# Altium PCB 数控稳压电源.PcbDoc
Units mil, origin at the board's own origin, x right, y up, seen from the top; angles counter-clockwise.
Board outline 17575 x 11690 mil, 2 copper layers (Top Layer, Bottom Layer); 59 components, 55 nets, 273 pads, 0 vias.
Unrouted connection lines stored in the file: 196.
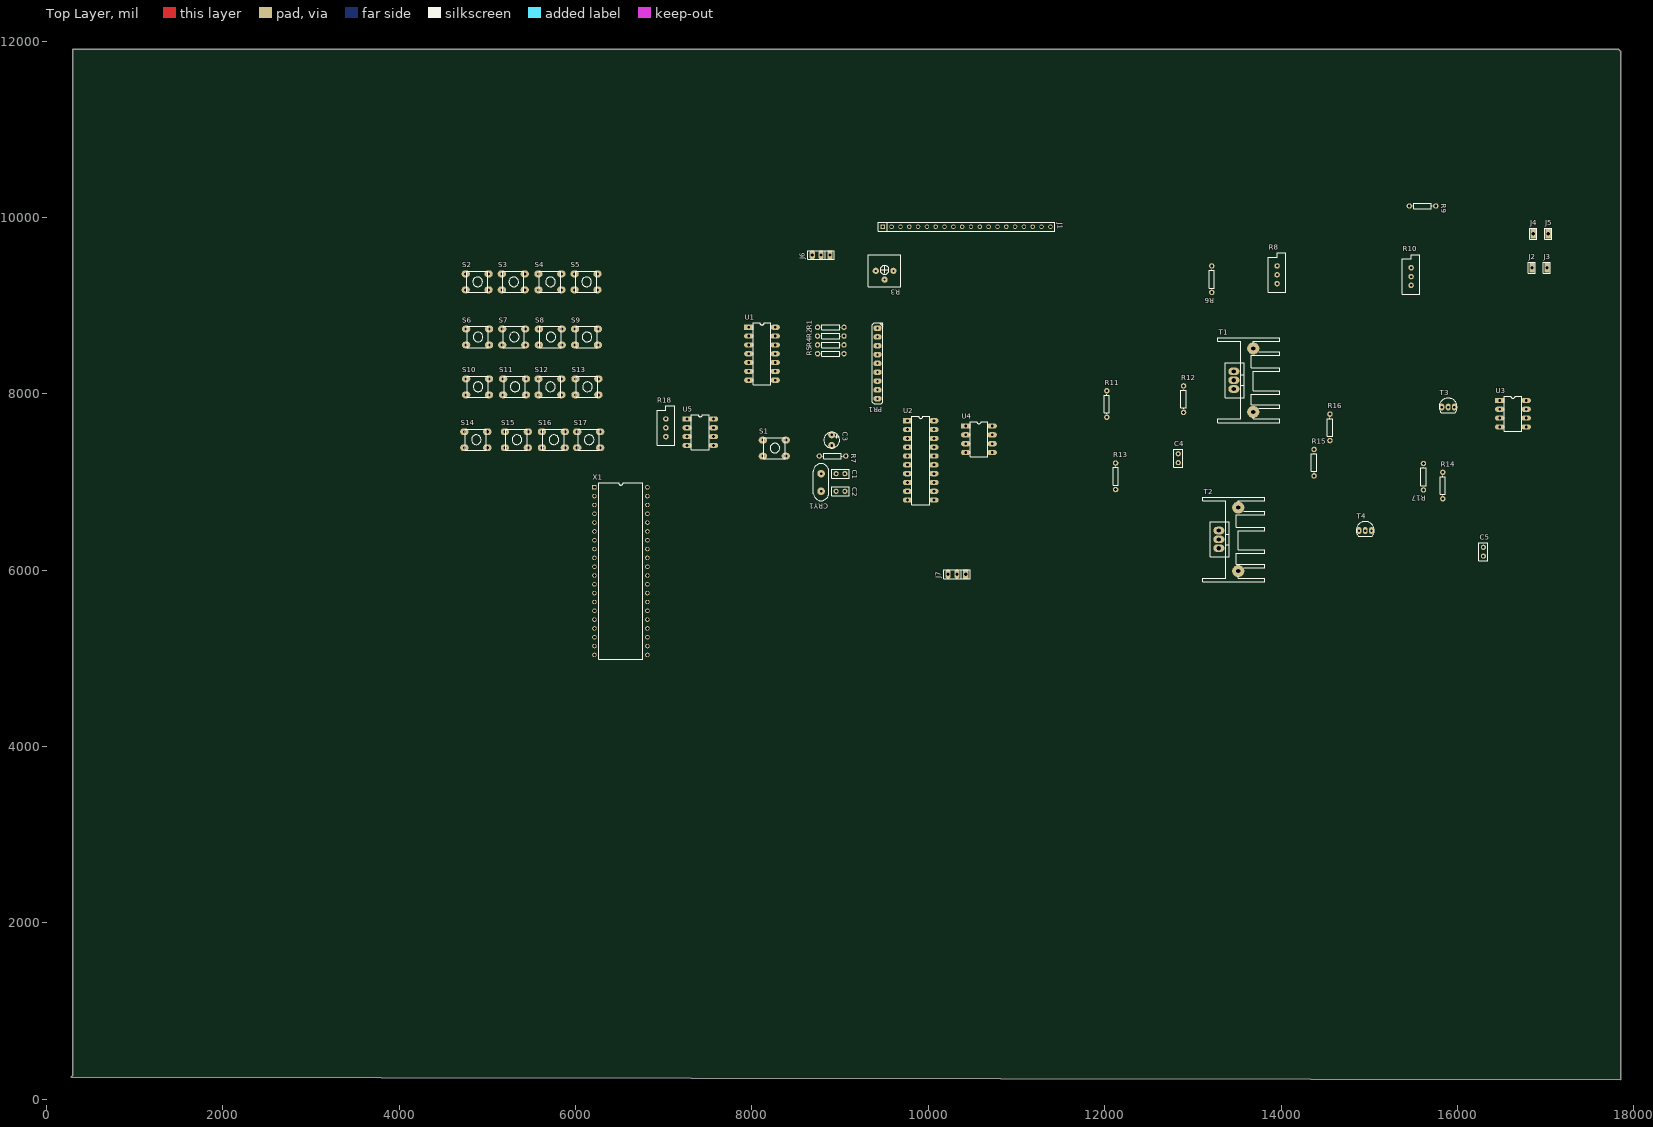
[diagram p0: Top Layer view]
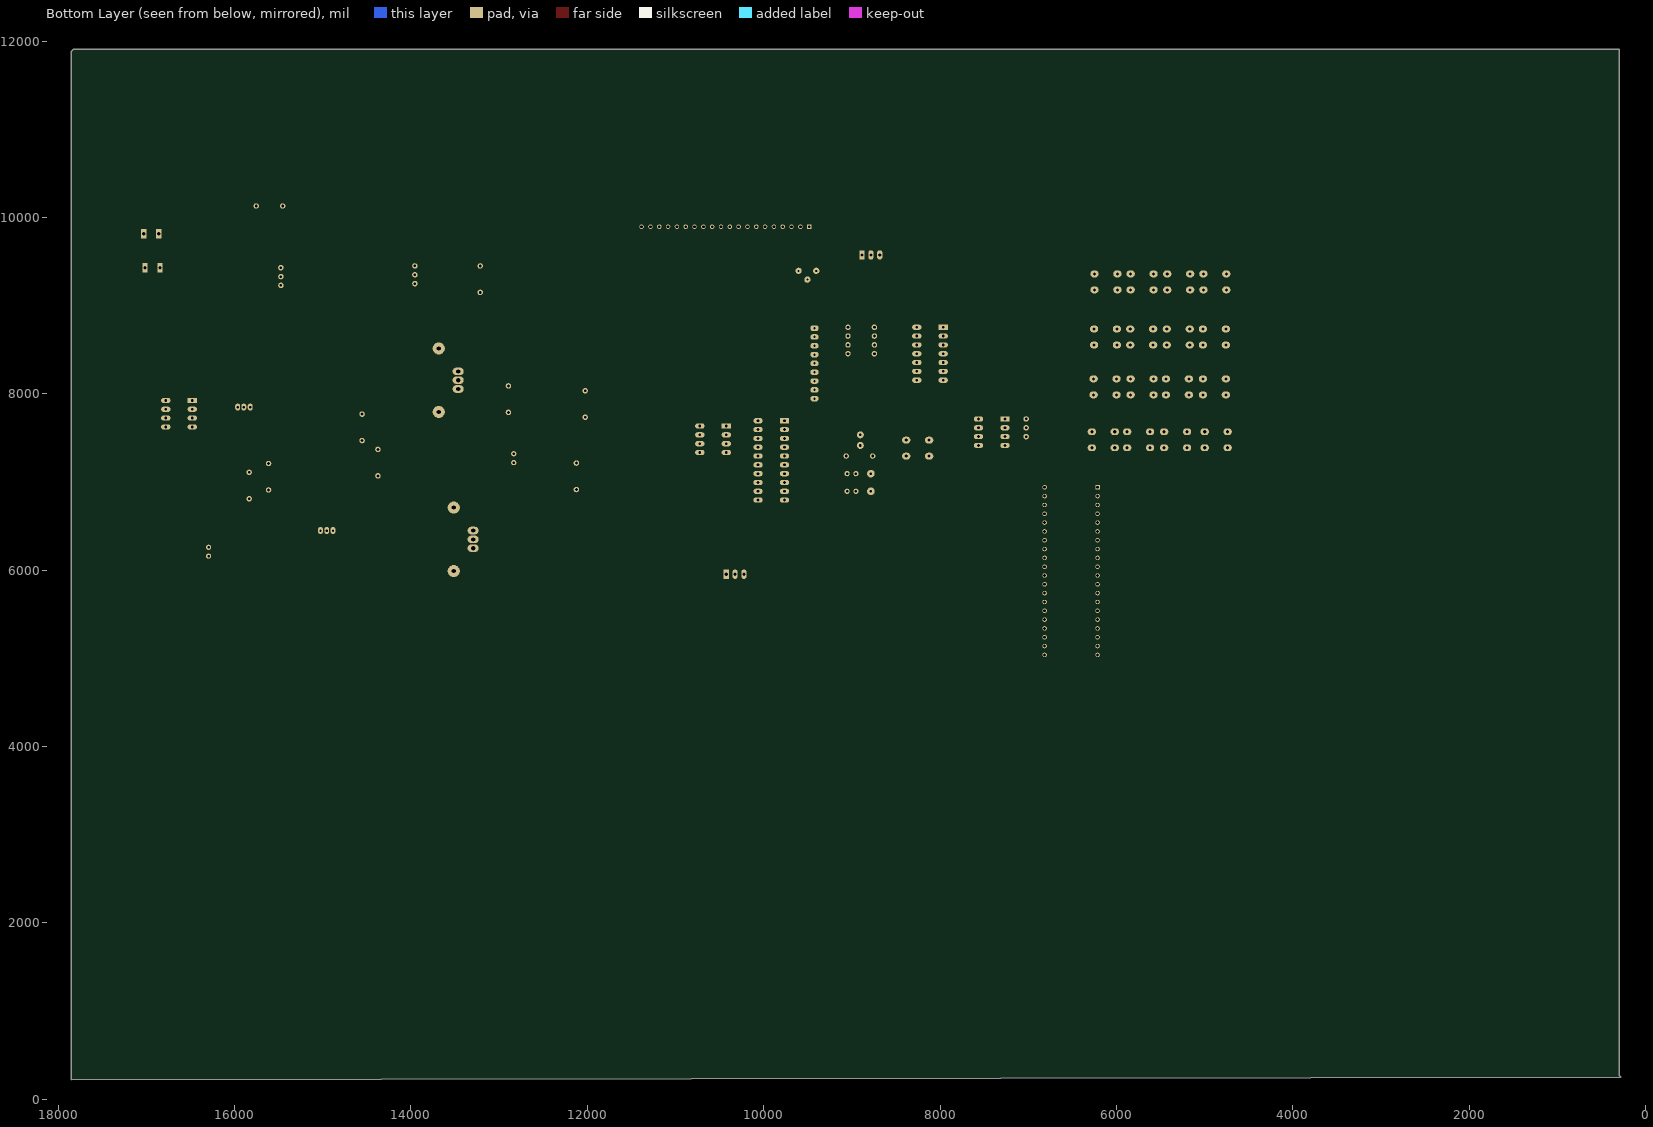
[diagram p1: Bottom Layer view, seen from below]

## Layer stack, top to bottom
Top Layer: signal copper 1.4
Dielectric: dielectric 12.6, FR-4, Dk 4.8
Bottom Layer: signal copper 1.4

## Board outline
280,250 300,270 300,11910 17825,11910 17855,11880 17855,220

## Design rules (kind name [scope] priority, off if disabled: settings)
Clearance [All] p1: gap=10
ComponentClearance [All] p1 off: gap=10 collisioncheckmode=3 verticalgap=10 showdistances=FALSE
Height [All] p1 off: minheight=0 maxheight=1000 prefheight=500
PolygonConnect [All] p1: connectstyle=Relief reliefconductorwidth=10 reliefentries=4 polygonreliefangle="90 Angle" airgapwidth=10
RoutingVias [All] p1: holewidth=28 width=50 viastyle="Through Hole" minholewidth=28 minwidth=50 maxholewidth=28 maxwidth=50
SilkToSolderMaskClearance SilkscreenOverComponentPads [IsPad] p1: minsilkscreentomaskgap=10 clearancetoexposedcopper=TRUE
SolderMaskExpansion [All] p1: expansion=4
Width [All] p1: maxlimit=10 minlimit=10 preferedwidth=10
25 further rules are at their usual default settings.

## Components (designator, comment, footprint, x,y, rotation, side; value= is the part's Value field where it differs from the comment)
C1 "30pF" CAP1 9005,7095 r0 top
C2 "30pF" CAP1 9005,6895 r0 top
C3 "10uF" RB1 8905,7475 r270 top
C4 "100pF" CAP1 12835,7270 r90 top
C5 "104" CAP1 16295,6210 r90 top
CRY1 "12Mhz" JZ1 8785,6995 r270 top
J1 "12864" sip20 9485,9895 r0 top
J2 "CON1" SIP-1 16845,9430 r0 top
J3 "CON1" SIP-1 17015,9430 r0 top
J4 "CON1" SIP-1 16860,9815 r0 top
J5 "CON1" SIP-1 17030,9815 r0 top
J6 "CON3" sip-3 8885,9575 r180 top
J7 "CON3" sip-3 10425,5955 r180 top
PR1 "PRES1" RP1 9425,8745 r270 top
R1 "10k" AXIAL0.3 9045,8755 r180 top
R2 "10k" AXIAL0.3 9045,8655 r180 top
R3 "10k" RVR-5 9505,9295 r180 top
R4 "10k" AXIAL0.3 9045,8555 r180 top
R5 "10k" AXIAL0.3 9045,8455 r180 top
R6 "9.1k" AXIAL0.3 13215,9450 r270 top
R7 "10k" AXIAL0.3 8765,7295 r0 top
R8 "5k/0.9k" VR5 13955,9250 r90 top
R9 "1k5" AXIAL0.3 15455,10130 r0 top
R10 "4.7k" VR5 15475,9230 r90 top
R11 "10k" AXIAL0.3 12025,7735 r90 top
R12 "2.7k" AXIAL0.3 12895,7790 r90 top
R13 "5.1k" AXIAL0.3 12125,6915 r90 top
R14 "330k" AXIAL0.3 15835,6810 r90 top
R15 "5.6k" AXIAL0.3 14375,7070 r90 top
R16 "15k" AXIAL0.3 14555,7470 r90 top
R17 "10k" AXIAL0.3 15615,7210 r270 top
R18 "4.7k" VR5 7025,7515 r90 top
S1 "SW-PB" SW6*6 8125,7475 r0 top
S2 "SW-PB" SW6*6 4755,9360 r0 top
S3 "SW-PB" SW6*6 5165,9360 r0 top
S4 "SW-PB" SW6*6 5580,9360 r0 top
S5 "SW-PB" SW6*6 5990,9360 r0 top
S6 "SW-PB" SW6*6 4760,8735 r0 top
S7 "SW-PB" SW6*6 5170,8735 r0 top
S8 "SW-PB" SW6*6 5585,8735 r0 top
S9 "SW-PB" SW6*6 5995,8735 r0 top
S10 "SW-PB" SW6*6 4760,8170 r0 top
S11 "SW-PB" SW6*6 5180,8170 r0 top
S12 "SW-PB" SW6*6 5580,8170 r0 top
S13 "SW-PB" SW6*6 6000,8170 r0 top
S14 "SW-PB" SW6*6 4740,7570 r0 top
S15 "SW-PB" SW6*6 5200,7570 r0 top
S16 "SW-PB" SW6*6 5620,7570 r0 top
S17 "SW-PB" SW6*6 6020,7570 r0 top
T1 "TIP127" TO220B 13685,8155 r90 top
T2 "TIP122" TO220B 13515,6350 r90 top
T3 "9015" TO-92 15895,7850 r0 top
T4 "9014" TO-92 14955,6450 r0 top
U1 "74LS21" DIP-14 7965,8755 r0 top
U2 "DAC0832" DIP-20 9765,7695 r0 top
U3 "OP07" DIP-8 16480,7925 r0 top
U4 "OP07" DIP-8 10425,7635 r0 top
U5 "TLC549" DIP-8 7265,7715 r0 top
X1 "AT89S51" DIP40 6215,6940 r0 top

## Footprints (in the part's own frame and the unit in brackets; to place one, negate y for a bottom-side part, rotate by r counter-clockwise, add the part's x,y. Pads: shape width x height; smd on the part's side, far side on the other; paste and mask are expansions set on the pad)
AXIAL0.3 [mil]
  round 62 hole 32: 1(0,0) 2(300,0)
  silkscreen extent 41,-30 259,30
CAP1 [mm]
  round 1.5 hole 0.7: 1(1.27,0) 2(-1.27,0)
  silkscreen extent -2.54,-1.27 2.54,1.27, body extent -2,-0.49 2,0.51, height 4.98
DIP40 [mil]
  rect 50x50 hole 32: 1(0,0)
  round 50 hole 32: 2(0,-100) 3(0,-200) 4(0,-300) 5(0,-400) 6(0,-500) 7(0,-600) 8(0,-700) 9(0,-800) 10(0,-900) 11(0,-1000) 12(0,-1100) 13(0,-1200) 14(0,-1300) 15(0,-1400) 16(0,-1500) 17(0,-1600) 18(0,-1700) 19(0,-1800) 20(0,-1900) 21(600,-1900) 22(600,-1800) 23(600,-1700) 24(600,-1600) 25(600,-1500) 26(600,-1400) 27(600,-1300) 28(600,-1200) 29(600,-1100) 30(600,-1000) 31(600,-900) 32(600,-800) 33(600,-700) 34(600,-600) 35(600,-500) 36(600,-400) 37(600,-300) 38(600,-200) 39(600,-100) 40(600,0)
  silkscreen extent 50,-1950 550,50
DIP-8 [mm]
  rect 2.7x1.5 hole 0.8: 1(0,0)
  oval 2.7x1.5 hole 0.8: 2(0,-2.54) 3(0,-5.08) 4(0,-7.62) 5(7.62,-7.62) 6(7.62,-5.08) 7(7.62,-2.54) 8(7.62,0)
  silkscreen extent 1.27,-8.89 6.35,1.27
DIP-14 [mm]
  rect 2.7x1.5 hole 0.8: 1(0,0)
  oval 2.7x1.5 hole 0.8: 2(0,-2.54) 3(0,-5.08) 4(0,-7.62) 5(0,-10.16) 6(0,-12.7) 7(0,-15.24) 8(7.62,-15.24) 9(7.62,-12.7) 10(7.62,-10.16) 11(7.62,-7.62) 12(7.62,-5.08) 13(7.62,-2.54) 14(7.62,0)
  silkscreen extent 1.27,-16.51 6.35,1.27
DIP-20 [mm]
  rect 2.7x1.5 hole 0.8: 1(0,0)
  oval 2.7x1.5 hole 0.8: 2(0,-2.54) 3(0,-5.08) 4(0,-7.62) 5(0,-10.16) 6(0,-12.7) 7(0,-15.24) 8(0,-17.78) 9(0,-20.32) 10(0,-22.86) 11(7.62,-22.86) 12(7.62,-20.32) 13(7.62,-17.78) 14(7.62,-15.24) 15(7.62,-12.7) 16(7.62,-10.16) 17(7.62,-7.62) 18(7.62,-5.08) 19(7.62,-2.54) 20(7.62,0)
  silkscreen extent 1.27,-24.13 6.35,1.27
JZ1 [mm]
  round 2.2 hole 0.7: 1(-2.54,0) 2(2.54,0)
  silkscreen extent -5.45,-2.2 5.25,2.2
RB1 [mm]
  round 2 hole 0.8: 1(-1.524,0) 2(1.524,0)
  silkscreen extent -2.27,-2.27 2.27,2.27
RP1 [mm]
  oct 1.6x2.4 hole 0.7: 1(0,0)
  oval 1.6x2.4 hole 0.7: 2(2.54,0) 3(5.08,0) 4(7.62,0) 5(10.16,0) 6(12.7,0) 7(15.24,0) 8(17.78,0) 9(20.32,0)
  silkscreen extent -1.52,-1.52 21.84,1.52
RVR-5 [mm]
  round 1.8 hole 0.6: 1(-2.54,-2.54) 2(0,0) 3(2.54,-2.54)
  silkscreen extent -4.7,-7.24 4.67,2.08, body extent -4.78,-7.36 4.75,2.17, height 5.08
sip20 [mil]
  rect 50x50 hole 32: 1(0,0)
  round 50 hole 32: 2(100,0) 3(200,0) 4(300,0) 5(400,0) 6(500,0) 7(600,0) 8(700,0) 9(800,0) 10(900,0) 11(1000,0) 12(1100,0) 13(1200,0) 14(1300,0) 15(1400,0) 16(1500,0) 17(1600,0) 18(1700,0) 19(1800,0) 20(1900,0)
  silkscreen extent -50,-50 1950,50
SIP-1 [mm]
  rect 1.5x2.7 hole 0.9: 1(0,0)
  silkscreen extent -1.02,-1.52 1.02,1.52
sip-3 [mm]
  rect 1.5x2.7 hole 0.9: 1(0,0)
  oval 1.5x2.7 hole 0.9: 2(2.54,0) 3(5.08,0)
  silkscreen extent -1.27,-1.27 6.35,1.27
SW6*6 [mm]
  oval 2.4x2 hole 0.9: 1(0,0) 1(6.6,0) 2(0,-4.6) 2(6.6,-4.6)
  silkscreen extent 0.28,-5.34 6.38,0.76
TO220B [mm]
  round 3.5 hole 1.2: 0(-9.144,0) 0(9.144,0)
  oval 2.2x3.2 hole 1.2: 1(2.54,5.588) 2(0,5.588) 3(-2.54,5.588)
  silkscreen extent -12.19,-7.62 12.19,10.16
TO-92 [mm] "TO, Flat Index; 3 In-Line, Axial Leads; Body Dia. 4.8mm; Leads 0.48 x 0.5 mm (max)"
  oval 1.4x2 hole 0.7: 1(-1.8,0) 2(0,0) 3(1.8,0)
  silkscreen extent -2.6,-1.6 2.6,2.6, body extent -2.6,-1.66 2.6,2.61, height 8
VR5 [mil]
  round 62 hole 28: 1(0,0) 2(100,0) 3(200,0)
  silkscreen extent -100,-100 350,100

## Part data
C1 C2 C4 C5: library part CAP1
C3: library part CAP3
CRY1: library part CRY1, "6.0000 8.000  11.0592  12.0000 24.000"
J1: library part CON20, "Connector"
J2 J3 J4 J5 J6 J7: "Connector"
R1 R2 R4 R5 R6 R7 R9 R11 R12 R13 R14 R15 R16 R17: library part RES
R3 R8 R10 R18: library part RPOT2, "Potentiometer"
T1: library part TIP42, "PNP PLASTIC POWER TRANSISTORS"
T2: library part TIP41, "NPN PLASTIC POWER TRANSISTORS"
T3 T4: "低电平、低噪的前置放大器做放大或震荡"
U3 U4: "Precision Operational Amplifier"

## Nets (pads, with @x,y where several pads share a name; then routed paths per layer and width w, separated by ;. In a path a pad name is that pad's centre, name@x,y a point inside that pad or via, vN(x,y) a via of type N, cw(c..) or ccw(c..) an arc to the next point about the centre after c; other vN are vias at no path point)
+5V: C3.1 J1.2 J1.15 J1.17 J1.19 J6.1 PR1.1 R1.1 R2.1 R3.1 R4.1 R5.1 R15.1 S1.1 U2.19 U2.20 U5.1 U5.8 X1.31 X1.40
+15V: J7.1 T2.2 U3.7 U4.7
-5V: J6.3 U2.8
-15V: C5.1 J7.3 R17.2 T1.2 T4.1 U3.4 U4.4
CLK: U5.7 X1.15
CS: U5.5 X1.17
D0: U2.7 X1.21
D1: U2.6 X1.22
D2: U2.5 X1.23
D3: U2.4 X1.24
D4: U2.16 X1.25
D5: U2.15 X1.26
D6: U2.14 X1.27
D7: U2.13 X1.28
DAT: U5.6 X1.16
EN: J1.6 X1.14
GND: C1.1 C2.1 J1.1 J1.20 J4.1 J5.1 J6.2 J7.2 R3.3 R7.2 R11.2 R18.1 U1.7 U2.1 U2.2 U2.3 U2.10 U2.12 U2.17 U2.18 U4.3 U5.3 U5.4 X1.20
INT0: R15.2 R16.2 U1.6 X1.12
INT1: X1.13
NetC1_2: C1.2 CRY1.1 X1.18
NetC2_2: C2.2 CRY1.2 X1.19
NetC3_2: C3.2 R7.1 S1.2 X1.9
NetC4_1: C4.1 R12.2 T1.1 T2.1 U3.6
NetC4_2: C4.2 R9.1 R10.3 R12.1 T1.3 T2.3 T3.1
NetC5_2: C5.2 R14.2 R17.1 T3.3
NetJ1_3: J1.3 R3.2
NetJ1_7: J1.7 PR1.2 X1.39
NetJ1_8: J1.8 PR1.3 X1.38
NetJ1_9: J1.9 PR1.4 X1.37
NetJ1_10: J1.10 PR1.5 X1.36
NetJ1_11: J1.11 PR1.6 X1.35
NetJ1_12: J1.12 PR1.7 X1.34
NetJ1_13: J1.13 PR1.8 X1.33
NetJ1_14: J1.14 PR1.9 X1.32
NetR6_2: R6.2 R8.3
NetR8_2: R8.2 R11.1 U3.2
NetR10_2: R10.2 T3.2
NetR13_1: R13.1 U2.9 U4.6
NetR13_2: R13.2 U3.3
NetR14_1: R14.1 T4.2
NetR16_1: R16.1 T4.3
NetR18_2: R18.2 U5.2
NetU2_11: U2.11 U4.2
P10: R1.2 S2.1 S3.1 S4.1 S5.1 U1.1 X1.1
P11: R2.2 S6.1 S7.1 S8.1 S9.1 U1.2 X1.2
P12: R4.2 S10.1 S11.1 S12.1 S13.1 U1.4 X1.3
P13: R5.2 S14.1 S15.1 S16.1 S17.1 U1.5 X1.4
P14: S2.2 S6.2 S10.2 S14.2 X1.5
P15: S3.2 S7.2 S11.2 S15.2 X1.6
P16: S4.2 S8.2 S12.2 S16.2 X1.7
P17: S5.2 S9.2 S13.2 S17.2 X1.8
RS: J1.4 X1.10
RW: J1.5 X1.11
UOUT: J2.1 J3.1 R6.1 R9.2 R10.1 R18.3
VCC: U1.14
pads on no net: J1.16 J1.18 R8.1 T1.0 T2.0 U1.3 U1.8 U1.9 U1.10 U1.11 U1.12 U1.13 U3.1 U3.5 U3.8 U4.1 U4.5 U4.8 X1.29 X1.30